# EAGLE board mapleSDuino-V0.1_014-eagle7 (EAGLE 7.6.0)
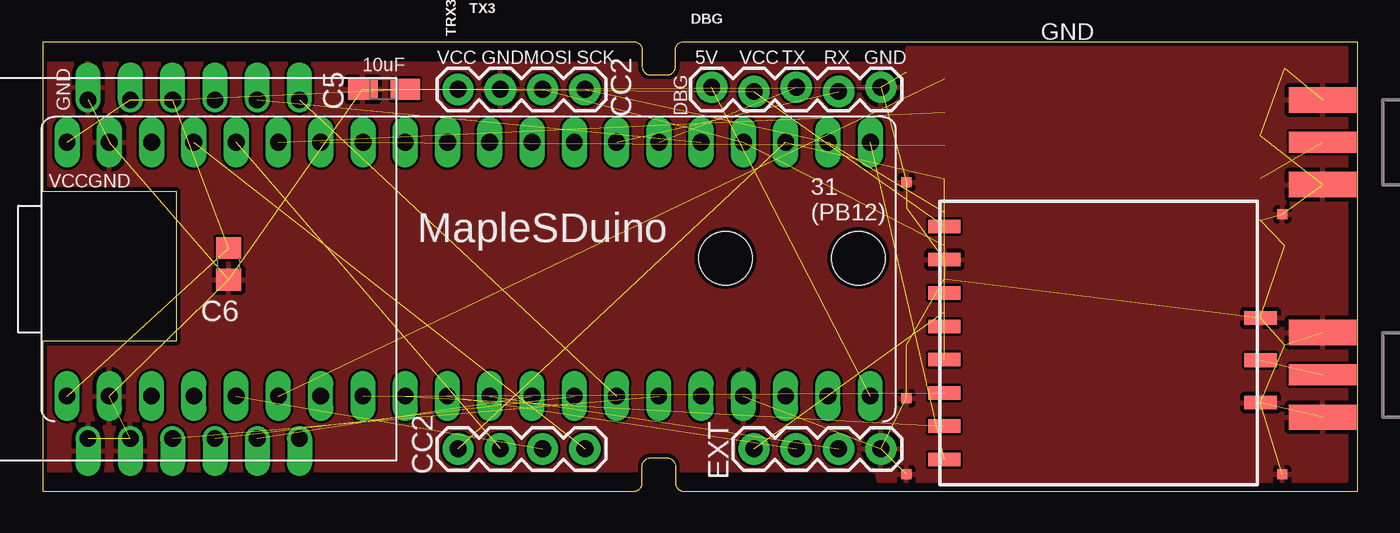
[diagram p0: board, top side]
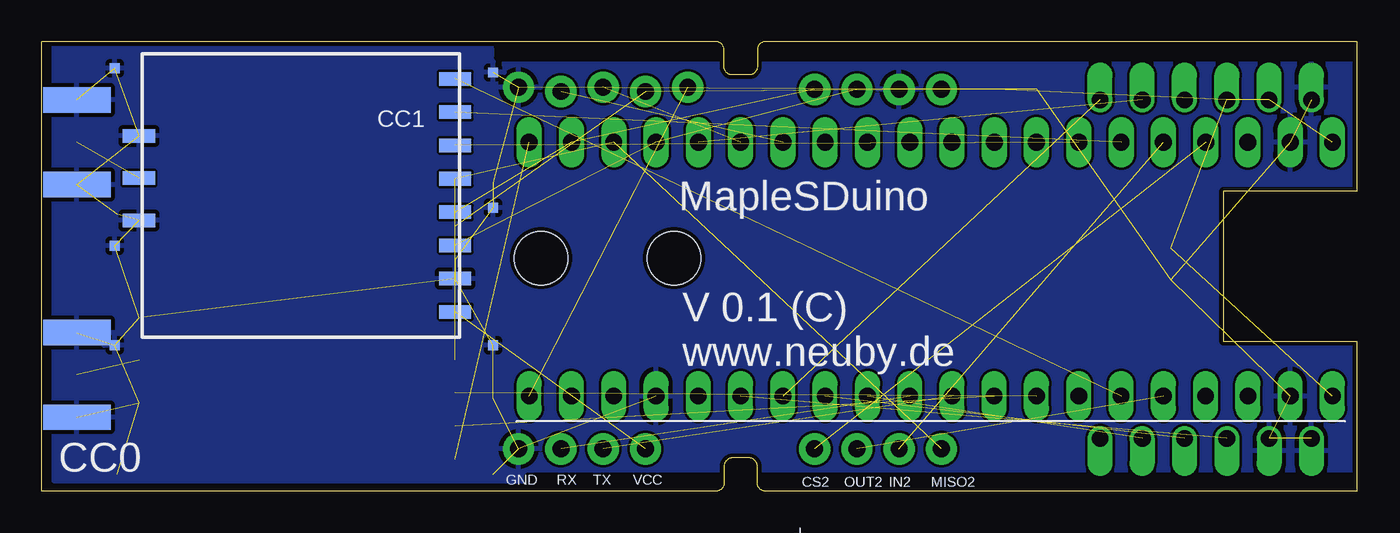
[diagram p1: board, bottom side, seen from below]

Size 79 x 27 mm. Coordinates in mm from the lower left corner, seen from the top.
Outline: 0,0 35.5,0 arc90 36,0.5 36,1.5 arc-90 36.5,2 37.5,2 arc-90 38,1.5 38,0.5 arc90 38.5,0 79,0 79,27 38.5,27 arc90 38,26.5 38,25.5 arc-90 37.5,25 36.5,25 arc-90 36,25.5 36,26.5 arc90 35.5,27 0,27 0,18 8,18 8,9 0,9 0,0
Copper layers (1*16): Top 0.035mm / dielectric 1.5mm / Bottom 0.035mm
Design rules "Fusion_eagle_rule_v1.1": minimum track width 6mil, minimum drill 12mil, track to track 6mil, track to pad 6mil, pad to pad 6mil, via to via 6mil, smd to smd 0mil, copper to edge 10mil, drill to drill 10mil, minimum pad ring 10mil, minimum via ring 6mil, stop-mask expansion 2mil, vias tented up to drill 100mil, thermal gap 10mil
Net classes: 0 default: width 0.305 mm; 1 PWR: width 0.406 mm
Holes 3.2 mm at 49,14 41,14
tRestrict: 11 lines
bRestrict: 8 lines

## Footprints (pad centres in the part's own frame; a part is rotated, then mirrored left to right if it is on the bottom)
R/2012-12W = smd 1.75 x 1.26: + 1.275,0; - -1.275,0
C0805 = smd 1.3 x 1.5: 1 -0.95,0; 2 0.95,0
CC1101_MODULE1_SMD = smd 1.93 x 0.813: ANT 19,5.96; CSN 0,0; GDO0 0,2; GDO2 0,4; GND@0 0,12; GND@1 19,8.5; GND@2 19,3.42; MISO 0,6; MOSI 0,10; SCLK 0,8; VCC 0,14
1X05_LOCK = drill 1.016 pad 1.88: 1 0,0.127; 2 2.54,-0.127; 3 5.08,0.127; 4 7.62,-0.127; 5 10.16,0.127
1X04 = drill 1.016 pad 1.88: 1 0,0; 2 2.54,0; 3 5.08,0; 4 7.62,0
USR-ES1 = drill 1 pad 1.35 offset: 1 -10.16,5.715; 2 -10.16,3.175; 3 -10.16,0.635; 4 -10.16,-1.905; 5 -10.16,-4.445; 6 -10.16,-6.985; 7 10.16,-6.985; 8 10.16,-4.445; 9 10.16,-1.905; 10 10.16,0.635; 11 10.16,3.175; 12 10.16,5.715
TP06SQ = smd 0.6 x 0.6: TP 0,0
20-DIP = drill 1.016 pad 1.27 long: 1 -24.13,-7.62; 2 -21.59,-7.62; 3 -19.05,-7.62; 4 -16.51,-7.62; 5 -13.97,-7.62; 6 -11.43,-7.62; 7 -8.89,-7.62; 8 -6.35,-7.62; 9 -3.81,-7.62; 10 -1.27,-7.62; 11 1.27,-7.62; 12 3.81,-7.62; 13 6.35,-7.62; 14 8.89,-7.62; 15 11.43,-7.62; 16 13.97,-7.62; 17 16.51,-7.62; 18 19.05,-7.62; 19 21.59,-7.62; 20 24.13,-7.62 | drill 1 pad 1.27 long: 21 24.13,7.62; 22 21.59,7.62; 23 19.05,7.62; 24 16.51,7.62; 25 13.97,7.62; 26 11.43,7.62; 27 8.89,7.62; 28 6.35,7.62; 29 3.81,7.62; 30 1.27,7.62; 31 -1.27,7.62; 32 -3.81,7.62; 33 -6.35,7.62; 34 -8.89,7.62; 35 -11.43,7.62; 36 -13.97,7.62; 37 -16.51,7.62; 38 -19.05,7.62; 39 -21.59,7.62; 40 -24.13,7.62
SMA_EDGELAUNCH = smd 4.064 x 1.524: GND@1 2.032,-2.54; GND@2 2.032,2.54 | smd 4.064 x 1.524 bottom: GND@3 2.032,2.54; GND@4 2.032,-2.54 | smd 4.064 x 1.27: P 2.032,0

## Placement (x,y rotation side)
C5  10uF  [R/2012-12W]  20.5,24.13 0 top
C6  22pF  [C0805]  11.14,13.65 270 top
CC0  CC1101  [CC1101_MODULE1_SMD]  54.15,1.91 0 top
CC1  CC1101_MODULE1SMD  [CC1101_MODULE1_SMD]  54.15,24.77 180 bottom
DBG  [1X05_LOCK]  40.18,24.13 0 top
EXT  [1X04]  42.72,2.54 0 top
IC2  LAN-USR-ES1  [USR-ES1]  8.43,13.34 90 top
TP1  TPTP06SQ  [TP06SQ]  51.86,1.02 0 top
TP2  TPTP06SQ  [TP06SQ]  51.86,5.59 0 top
TP3  TPTP06SQ  [TP06SQ]  51.86,18.54 90 top
TP4  TPTP06SQ  [TP06SQ]  74.47,1.02 90 top
TP5  TPTP06SQ  [TP06SQ]  74.47,16.64 90 top
TP6  TPTP06SQ  [TP06SQ]  51.86,25.15 90 bottom
TP7  TPTP06SQ  [TP06SQ]  74.6,25.4 90 bottom
TP8  TPTP06SQ  [TP06SQ]  74.6,8.76 90 bottom
TP9  TPTP06SQ  [TP06SQ]  51.86,8.76 90 bottom
TP10  TPTP06SQ  [TP06SQ]  74.6,14.73 90 bottom
TP11  TPTP06SQ  [TP06SQ]  51.86,17.02 90 bottom
TRX3  [1X04]  24.94,24.13 0 top
TX3  [1X04]  24.94,2.54 0 top
U$1  MAPLEMINI  [20-DIP]  25.57,13.34 180 bottom
X1  [SMA_EDGELAUNCH]  78.92,6.99 180 top
X2  [SMA_EDGELAUNCH]  78.92,20.95 180 top

## Library data of the parts
C5 C6 = rcl
CC0 CC1 = wireless
DBG = SparkFun-Connectors
EXT TRX3 TX3 = SparkFun-Connectors; PROD_ID: CONN-09696
IC2 = Martin-Communication
TP1-TP11 = testpad
U$1 = maplemini-small
X1 X2 = adafruit

## Nets
+5V [PWR]: DBG.1 U$1.21
ANT1 [PWR]: CC1.ANT X2.P
ANT2: CC0.ANT X1.P
CC_CS0: CC0.CSN U$1.20
CC_CS1: CC1.CSN U$1.35
CC_CS2: TX3.4 U$1.4
CC_CS3: U$1.25
CC_IN_0: CC0.GDO2 U$1.33
CC_IN_1: CC1.GDO2 U$1.7
CC_IN_2: TX3.2 U$1.5
CC_IN_3: U$1.37
CC_OUT_0: CC0.GDO0 U$1.32
CC_OUT_1: CC1.GDO0 U$1.6
CC_OUT_2: TX3.3 U$1.36
GND [PWR]: C5.- C6.2 CC0.GND@0 CC0.GND@1 CC0.GND@2 CC1.GND@0 CC1.GND@1 CC1.GND@2 DBG.5 EXT.4 IC2.1 IC2.2 IC2.12 TP1.TP TP2.TP TP3.TP TP4.TP TP5.TP TP6.TP TP7.TP TP8.TP TP9.TP TP10.TP TP11.TP TRX3.2 U$1.2 U$1.24 U$1.39 X1.GND@1 X1.GND@2 X1.GND@3 X1.GND@4 X2.GND@1 X2.GND@2 X2.GND@3 X2.GND@4
MISO1: IC2.7 U$1.27
MISO2: CC0.MISO CC1.MISO TX3.1 U$1.18
MOSI1: IC2.3 U$1.26
MOSI2: CC0.MOSI CC1.MOSI TRX3.3 U$1.17
NRESET: U$1.34
RX1: DBG.4 U$1.14
RX2: EXT.3 U$1.30
RX3: U$1.22
SCK1: IC2.4 U$1.28
SCK2: CC0.SCLK CC1.SCLK TRX3.4 U$1.19
SS1: IC2.5 U$1.29
SWCLK/TCK: U$1.10
SWDIO/TMS: U$1.11
SWO/TDO: U$1.8
TDI: U$1.9
TX1: DBG.3 U$1.15
TX2: EXT.2 U$1.31
TX3: U$1.23
VCC [PWR]: C5.+ C6.1 CC0.VCC CC1.VCC DBG.2 EXT.1 IC2.10 IC2.11 TRX3.1 U$1.1 U$1.40
WIZ_RST: IC2.8 U$1.16

## Tracks (layer width: path | path; a pad name or v marks a point on that pad's centre or on a via)
+5V  (1 unrouted)
ANT1  (1 unrouted)
ANT2  (1 unrouted)
CC_CS0  (1 unrouted)
CC_CS1  (1 unrouted)
CC_CS2  (1 unrouted)
CC_IN_0  (1 unrouted)
CC_IN_1  (1 unrouted)
CC_IN_2  (1 unrouted)
CC_OUT_0  (1 unrouted)
CC_OUT_1  (1 unrouted)
CC_OUT_2  (1 unrouted)
GND  (35 unrouted)
  pour Top: 0.17,26.67 78.28,26.67 78.28,0.64 0.17,0.64
  pour Bottom: 0.17,26.67 78.28,26.67 78.28,0.64 0.17,0.64
MISO1  (1 unrouted)
MISO2  (3 unrouted)
MOSI1  (1 unrouted)
MOSI2  (3 unrouted)
RX1  (1 unrouted)
RX2  (1 unrouted)
SCK1  (1 unrouted)
SCK2  (3 unrouted)
SS1  (1 unrouted)
TX1  (1 unrouted)
TX2  (1 unrouted)
VCC  (10 unrouted)
WIZ_RST  (1 unrouted)

## Text on the board
tNames: GND | TX | RX | GND | 10uF | VCC | GND | MOSI | SCK | 5V | VCC | TX | RX | GND | GND | DBG | CC2 | VCC | GND | 31 / (PB12) | MapleSDuino | EXT | CC2
bNames: CC1 | MapleSDuino | V 0.1 (C) / www.neuby.de | CC0 | MISO2 | IN2 | OUT2 | CS2 | VCC | TX | RX | GND | + | GND